# Altium PCB PCB1.PcbDoc
Units mm, origin at the board's own origin, x right, y up, seen from the top; angles counter-clockwise.
Board outline 42 x 60 mm, 2 copper layers (Top Layer, Bottom Layer), stack 1.57 mm thick; 35 components, 51 nets, 178 pads, 7 vias.
Unrouted connection lines stored in the file: 61.
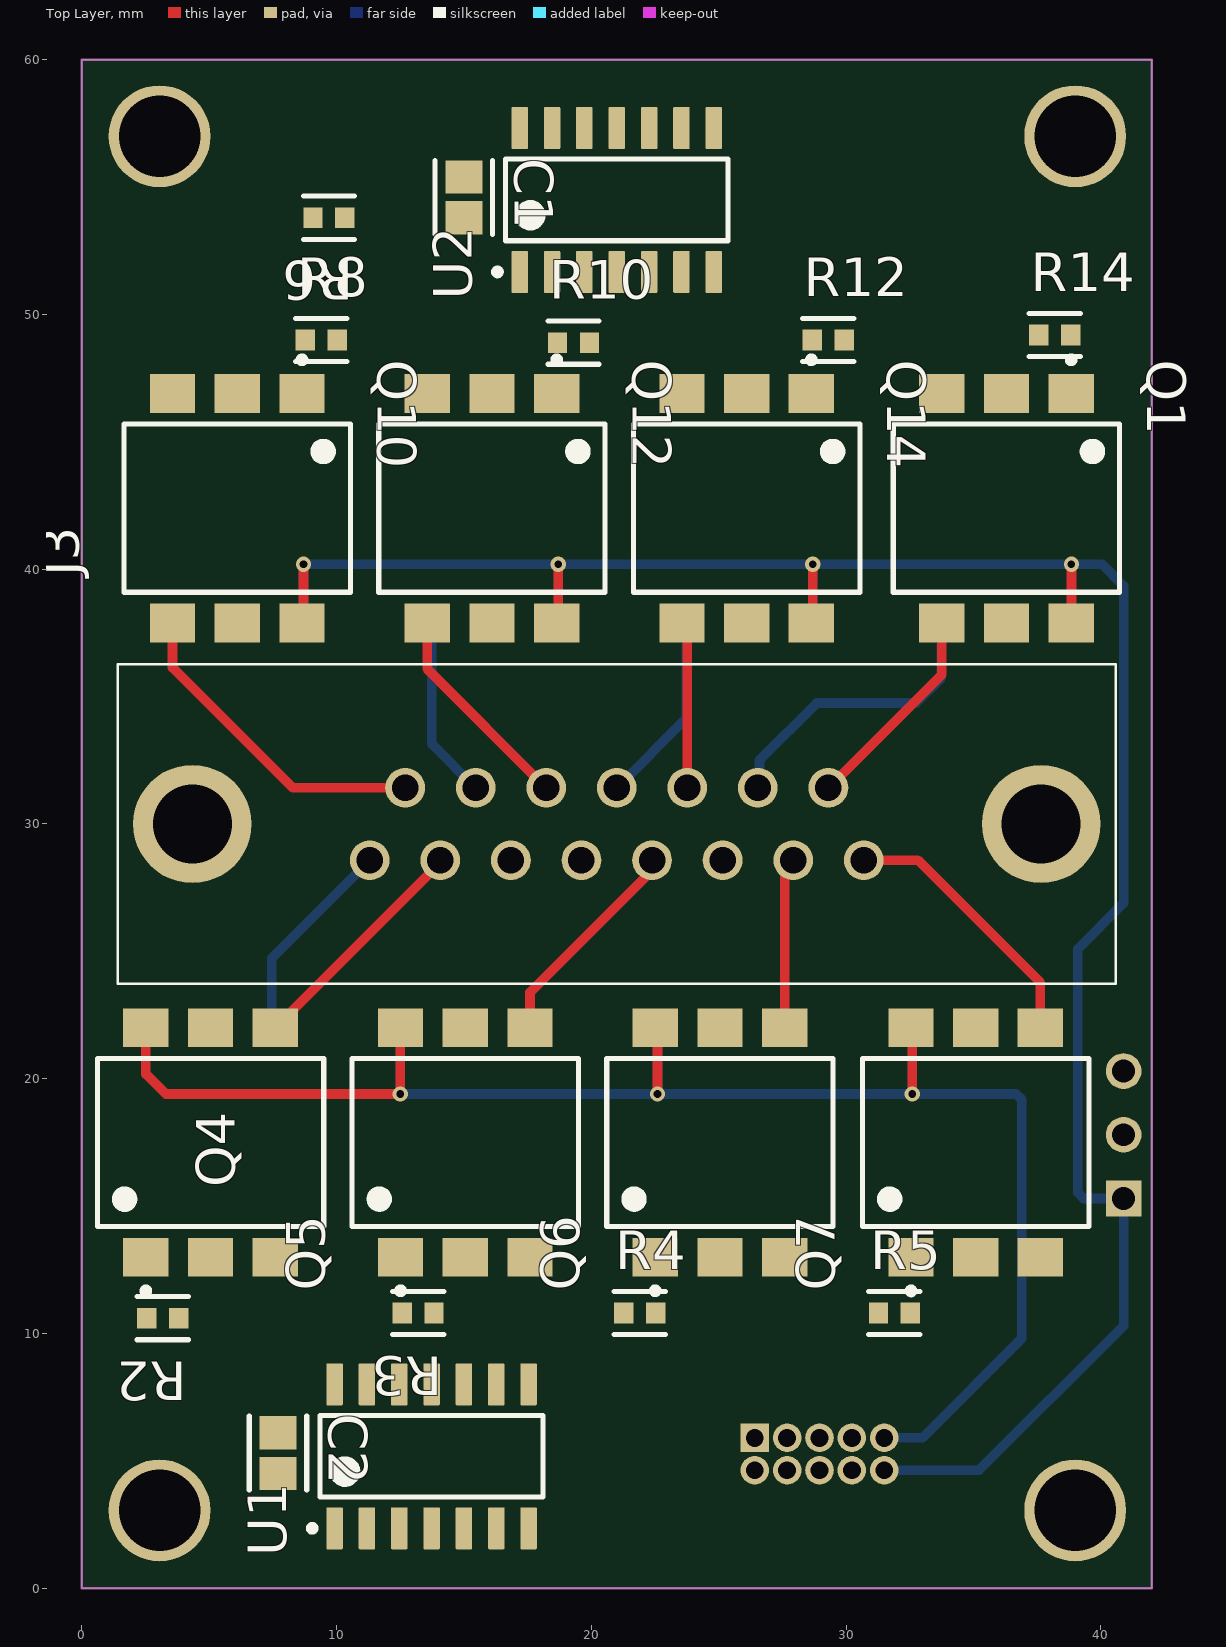
[diagram p0: Top Layer view]
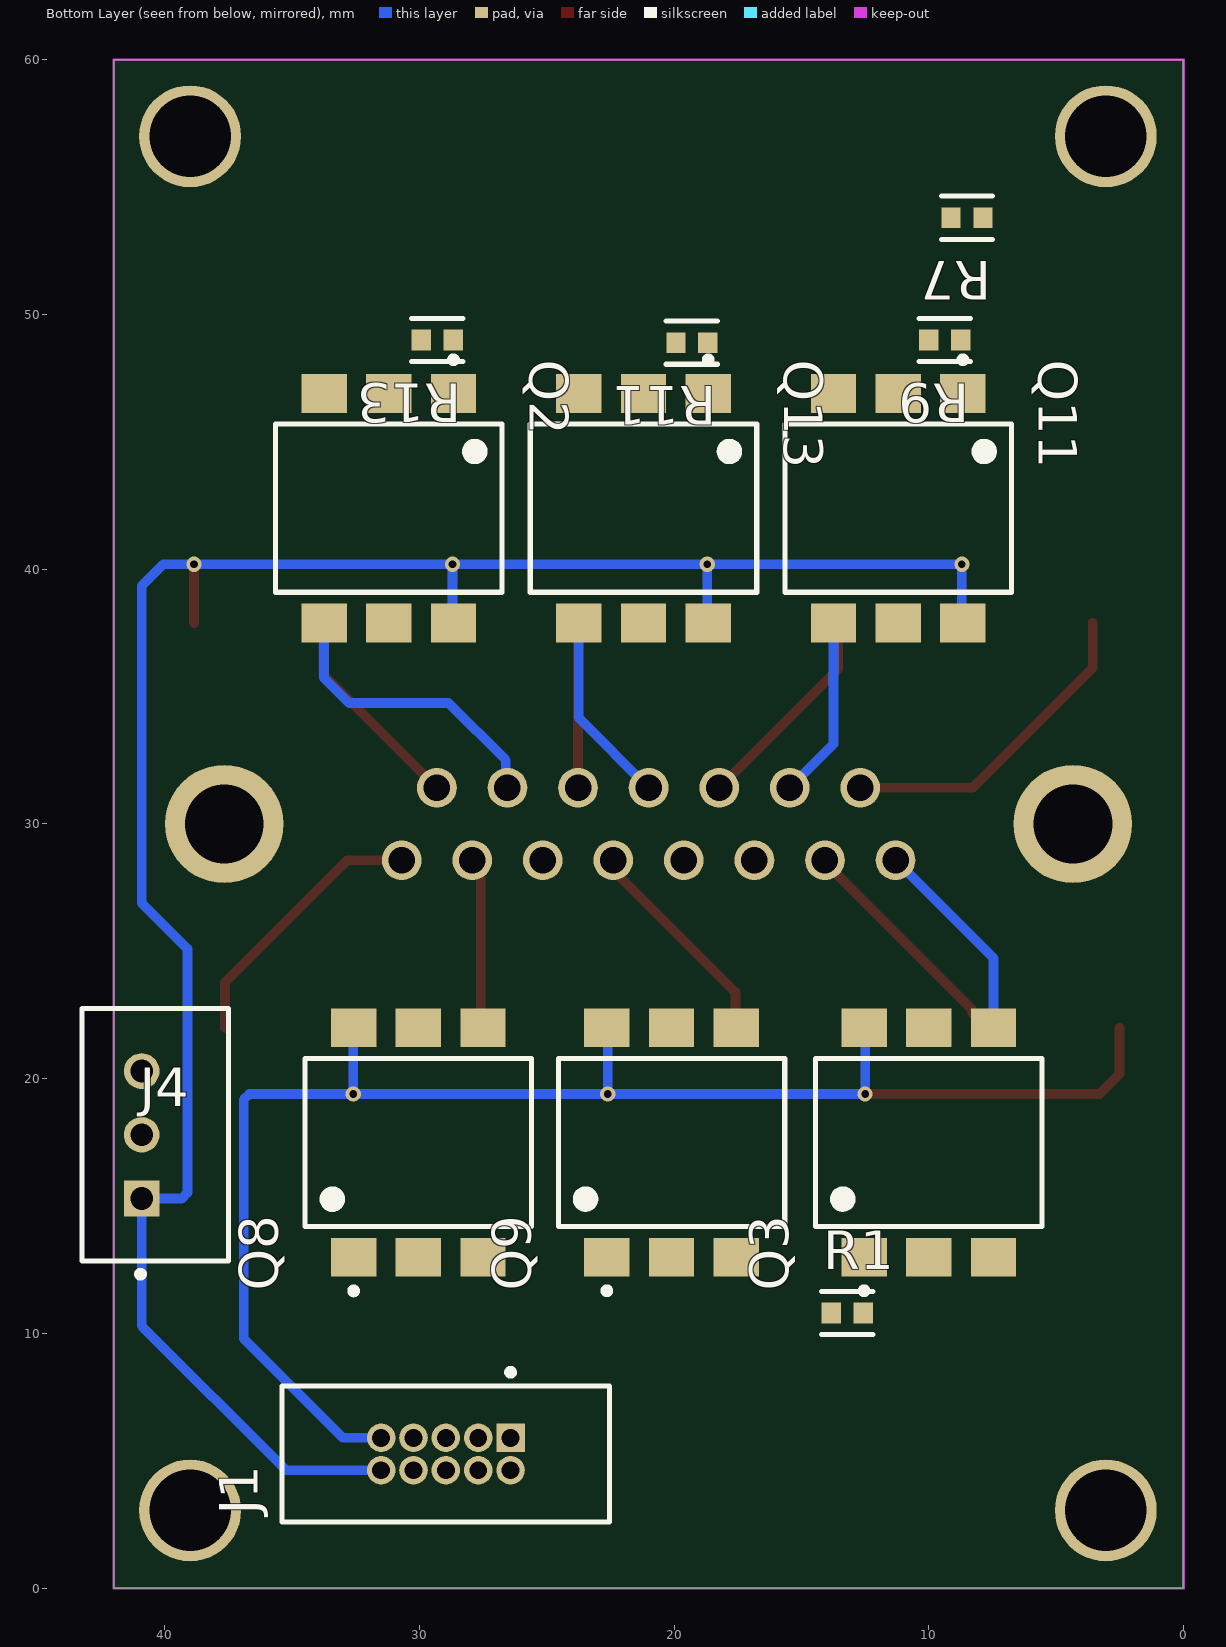
[diagram p1: Bottom Layer view, seen from below]

## Layer stack, top to bottom
Top Solder: solder mask 0.0102, Solder Resist, Dk 3.5
Top Layer: signal copper 0.0356
Dielectric 1: core 1.4986, Core-043, Dk 4.3
Bottom Layer: signal copper 0.0356
Bottom Solder: solder mask 0.0102, Solder Resist, Dk 3.5

## Board outline
0,0 0,60 42,60 42,0

## Design rules (kind name [scope] priority, off if disabled: settings)
AcuteAngle [All] p1: minimum=6.00000000000000E+0001 checktracksonly=TRUE
Clearance Clearance_HV [All vs InNetClass('HV')] p1: gap=0.5 ignorepadtopadclearanceinfootprint=FALSE
Clearance [All] p2: gap=0.254 ignorepadtopadclearanceinfootprint=TRUE except(0: Arc-Text Track-Text Text-Text; 0.089: Arc-Arc Arc-Track Track-Track; 0.127: Arc-SMDPad Arc-THPad Track-SMDPad Track-THPad SMDPad-SMDPad SMDPad-THPad SMDPad-Via SMDPad-Fill THPad-Via; 0.381: SMDPad-Text THPad-Text Via-Text Fill-Text Poly-Text Region-Text; 0.508: THPad-THPad)
DiffPairsRouting [All] p1: maxlimit=0.254 minlimit=0.254 mostfreqgap=0.254 toplayer_minwidth=0.1 toplayer_maxwidth=0.3 toplayer_prefwidth=0.2 bottomlayer_minwidth=0.1 bottomlayer_maxwidth=0.3 bottomlayer_prefwidth=0.2 maxuncoupledlength=12.7
HoleSize [All] p1: absolutevalues=TRUE maxlimit=6.35 minlimit=0.203 maxpercent=80.000 minpercent=20.000
MinimumAnnularRing [All] p1: minimumring=0.13
MinimumSolderMaskSliver [All] p1: minsoldermaskwidth=0.1
PolygonConnect PolygonConnect_6 [All vs IsNamedPolygon('NETDD1_1_L01_P035')] p1: connectstyle=Direct reliefconductorwidth=0.254 reliefentries=4 polygonreliefangle="90 Angle" airgapwidth=0.254
PolygonConnect PolygonConnect_5 [All vs IsNamedPolygon('NETDD1_3_L01_P034')] p2: connectstyle=Direct reliefconductorwidth=0.254 reliefentries=4 polygonreliefangle="90 Angle" airgapwidth=0.254
PolygonConnect PolygonConnect_4 [All vs IsNamedPolygon('NETDD1_3_L01_P034')] p3: connectstyle=Direct reliefconductorwidth=0.254 reliefentries=4 polygonreliefangle="90 Angle" airgapwidth=0.254
PolygonConnect PolygonConnect_3 [All vs IsNamedPolygon('NETDD1_3_L01_P034')] p4: connectstyle=Direct reliefconductorwidth=0.254 reliefentries=4 polygonreliefangle="90 Angle" airgapwidth=0.254
PolygonConnect PolygonConnect_2 [All vs IsNamedPolygon('NETDD1_3_L01_P027')] p5: connectstyle=Direct reliefconductorwidth=0.254 reliefentries=4 polygonreliefangle="90 Angle" airgapwidth=0.254
PolygonConnect PolygonConnect_1 [All vs IsNamedPolygon('NETDD1_3_L01_P027')] p6: connectstyle=Direct reliefconductorwidth=0.254 reliefentries=2 polygonreliefangle="90 Angle" airgapwidth=0.254
PolygonConnect [All] p7: connectstyle=Relief reliefconductorwidth=0.254 reliefentries=4 polygonreliefangle="90 Angle" airgapwidth=0.254
RoutingVias [All] p1: holewidth=0.406 width=0.813 viastyle="Through Hole" minholewidth=0.254 minwidth=0.457 maxholewidth=5.08 maxwidth=7.62
SilkToSolderMaskClearance [IsPad] p1: minsilkscreentomaskgap=0.152 clearancetoexposedcopper=TRUE
SolderMaskExpansion [All] p1: expansion=0.05 istentingtop=FALSE
UnpouredPolygon [All] p1: allowunpoured=TRUE
Width [All] p1: maxlimit=25.4 minlimit=0.102 preferedwidth=0.203
25 further rules are at their usual default settings.

## Classes and differential pairs
net class HV: "HS 1" "HS 2" "HS 3" "HS 4" "HS 5" "HS A" "HS B" "HS C" "HS D" "HS Dot1" "HS Dot2" "HS E" "HS F" "HS G" L N

## Components (designator, comment, footprint, x,y, rotation, side; value= is the part's Value field where it differs from the comment)
C1 "C0805C104M5RACTU" FP-C0805C-DN-IPC_B 15,54.599 r270 top value="0.10 μF"
C2 "C0805C104M5RACTU" FP-C0805C-DN-IPC_B 7.7,5.3 r270 top value="0.10 μF"
J1 "3220-10-0100-00" FP-3220-10-0100-00-MFG 28.96,5.265 r0 bottom
J3 "2301828-1" 23018281 21,30 r180 top locked
J4 "B3B-XH-A(LF)(SN)" FP-B3B-XH-A_LF_SN-MFG 40.375,17.8 r90 bottom
Q1 "MOC3063SR2VM" FP-646BY-MFG 36.3,42.4 r270 top locked
Q2 "MOC3063SR2VM" FP-646BY-MFG 31.2,42.4 r270 bottom locked
Q3 "MOC3063SR2VM" FP-646BY-MFG 10,17.5 r90 bottom locked
Q4 "MOC3063SR2VM" FP-646BY-MFG 5.052,17.495 r90 top locked
Q5 "MOC3063SR2VM" FP-646BY-MFG 15.052,17.5 r90 top locked
Q6 "MOC3063SR2VM" FP-646BY-MFG 25.052,17.5 r90 top locked
Q7 "MOC3063SR2VM" FP-646BY-MFG 35.092,17.495 r90 top locked
Q8 "MOC3063SR2VM" FP-646BY-MFG 30.04,17.495 r90 bottom locked
Q9 "MOC3063SR2VM" FP-646BY-MFG 20.1,17.5 r90 bottom locked
Q10 "MOC3063SR2VM" FP-646BY-MFG 6.1,42.4 r270 top locked
Q11 "MOC3063SR2VM" FP-646BY-MFG 11.2,42.4 r270 bottom locked
Q12 "MOC3063SR2VM" FP-646BY-MFG 16.1,42.4 r270 top locked
Q13 "MOC3063SR2VM" FP-646BY-MFG 21.2,42.4 r270 bottom locked
Q14 "MOC3063SR2VM" FP-646BY-MFG 26.1,42.4 r270 top locked
R1 "CRGCQ0603F270R" FP-CRGCQ0603-IPC_C 13.2,10.8 r180 bottom value=270Ω
R2 "CRGCQ0603F270R" FP-CRGCQ0603-IPC_C 3.173,10.6 r180 top value=270Ω
R3 "CRGCQ0603F270R" FP-CRGCQ0603-IPC_C 13.2,10.8 r180 top value=270Ω
R4 "CRGCQ0603F270R" FP-CRGCQ0603-IPC_C 21.9,10.8 r0 top value=270Ω
R5 "CRGCQ0603F270R" FP-CRGCQ0603-IPC_C 31.9,10.8 r0 top value=270Ω
R6 "CRGCQ0603F270R" FP-CRGCQ0603-IPC_C 9.7,53.8 r180 top value=270Ω
R7 "CRGCQ0603F270R" FP-CRGCQ0603-IPC_C 8.5,53.8 r0 bottom value=270Ω
R8 "CRGCQ0603F270R" FP-CRGCQ0603-IPC_C 9.4,49 r0 top value=270Ω
R9 "CRGCQ0603F270R" FP-CRGCQ0603-IPC_C 9.373,49 r0 bottom value=270Ω
R10 "CRGCQ0603F270R" FP-CRGCQ0603-IPC_C 19.3,48.9 r0 top value=270Ω
R11 "CRGCQ0603F270R" FP-CRGCQ0603-IPC_C 19.3,48.9 r0 bottom value=270Ω
R12 "CRGCQ0603F270R" FP-CRGCQ0603-IPC_C 29.3,49 r0 top value=270Ω
R13 "CRGCQ0603F270R" FP-CRGCQ0603-IPC_C 29.3,49 r0 bottom value=270Ω
R14 "CRGCQ0603F270R" FP-CRGCQ0603-IPC_C 38.2,49.2 r0 top value=270Ω
U1 "SN74HC164DR" D0014A_M 13.73,5.175 r90 top
U2 "SN74HC164DR" D0014A_M 21,54.5 r90 top

## Footprints (in the part's own frame and the unit in brackets; to place one, negate y for a bottom-side part, rotate by r counter-clockwise, add the part's x,y. Pads: shape width x height; smd on the part's side, far side on the other; paste and mask are expansions set on the pad)
23018281 [mm]
  round 1.56 hole 1.04: 1(-9.695,1.42) 2(-6.925,1.42) 3(-4.155,1.42) 4(-1.385,1.42) 5(1.385,1.42) 6(4.155,1.42) 7(6.925,1.42) 8(9.695,1.42) 9(-8.31,-1.42) 10(-5.54,-1.42) 11(-2.77,-1.42) 12(0,-1.42) 13(2.77,-1.42) 14(5.54,-1.42) 15(8.31,-1.42)
  round 4.65 hole 3.1: MH1(-16.66,0) MH2(16.66,0)
  silkscreen extent -19.59,-6.28 19.59,6.27, body extent -19.58,-6.25 19.6,6.29, height 13
D0014A_M [mm] "SOIC, 14-Leads, Body 8.75x4mm, Pitch 1.27mm, IPC Low Density"
  rrect15% 1.65x0.65 smd: 1(-2.825,3.81) 2(-2.825,2.54) 3(-2.825,1.27) 4(-2.825,0) 5(-2.825,-1.27) 6(-2.825,-2.54) 7(-2.825,-3.81) 8(2.825,-3.81) 9(2.825,-2.54) 10(2.825,-1.27) 11(2.825,0) 12(2.825,1.27) 13(2.825,2.54) 14(2.825,3.81)
  silkscreen extent -2.95,-4.38 1.6,4.81, body extent -3.02,-4.32 3.02,4.32, height 1.59
FP-646BY-MFG [mm]
  rect 1.52x1.78 smd paste+0 mask+0: 1(-4.505,2.54) 2(-4.505,0) 3(-4.505,-2.54) 4(4.505,-2.54) 5(4.505,0) 6(4.505,2.54)
  silkscreen extent -5.95,-4.45 3.3,4.45, body extent -4.58,-4.26 4.58,4.26, height 4.95
FP-3220-10-0100-00-MFG [mm]
  rect 1.12x1.12 hole 0.7 paste-2539.97 mask+0: 1(-2.54,-0.635)
  round 1.12 hole 0.7 paste-2539.97 mask+0: 2(-2.54,0.635) 3(-1.27,-0.635) 4(-1.27,0.635) 5(0,-0.635) 6(0,0.635) 7(1.27,-0.635) 8(1.27,0.635) 9(2.54,-0.635) 10(2.54,0.635)
  silkscreen extent -6.43,-3.33 6.43,2.68, body extent -6.32,-2.58 6.32,2.55, height 5.4
FP-B3B-XH-A_LF_SN-MFG [mm]
  rect 1.4x1.4 hole 0.9 paste-2539.97 mask+0: 1(-2.5,0.525)
  round 1.4 hole 0.9 paste-2539.97 mask+0: 2(0,0.525) 3(2.5,0.525)
  silkscreen extent -5.6,-2.88 4.95,2.88, body extent -4.95,-2.88 4.95,2.89, height 7
FP-C0805C-DN-IPC_B [mm]
  rect 1.305x1.456 smd paste+0 mask+0: 1(-0.801,0) 2(0.801,0)
  silkscreen extent -1.45,-1.13 1.45,1.13, body extent -1.7,-0.98 1.7,0.98, height 0.25
FP-CRGCQ0603-IPC_C [mm]
  rect 0.758x0.812 smd paste+0 mask+0: 1(-0.627,0) 2(0.627,0)
  silkscreen extent -1.01,-0.85 1.01,0.85, body extent -0.8,-0.4 0.8,0.4, height 0.55

## Part data
C1 C2: library part CMP-1036-04423-3, "CAP CER 0.1UF 50V X7R 0805", Capacitance="0.10 μF", Manufacturer=KEMET, Package=C0805C-DN, Temperature="-55°C to +125°C", Temperature Characteristic=X7R, Temperature Coefficient=30ppm/°C, Temperature Range High=+125°C, Temperature Range Low=-55°C, Tolerance=0.2, Voltage Rating="50 V", Automotive=No, Category=Cap, ComponentLink2Description=Datasheet, ComponentLink2URL=https://content.kemet.com/datasheets/KEM_C1003_C0G_SMD.pdf, Device Class L1="Passive Components", Device Class L2=Capacitors, Device Class L3="Ceramic Capacitors", Digikey Description="CAP CER 0.1UF 50V X7R 0805", Height=0.88mm, Ipc Land Pattern Name=CAPC200125X78, Lead Free=Yes, Manufacturer Part Number=C0805C104M5RACTU, Material=Ceramic, Mouser Description="Multilayer Ceramic Capacitors MLCC - SMD/SMT 50volts 0.1uF X7R 20%", Octopart=https://octopart.com/c0805c104m5ractu-kemet-129379, RoHS=TRUE
J1: library part CMP-04151-26714221-1, "3220-10-0100-00 Conn Shrouded Header (4 Sides) HDR 10 POS 1.27mm Solder ST Top Entry Thru-Hole", Current Rating=1A, Max Operating Temperature=105°C, Min Operating Temperature=-40°C, Connector Type="Male Pin", Contact Material=Gold, Contact Plating=Gold, Height=5.6mm, Mount="Through Hole", NexarPartId=26714221, Number of Contacts=10, Number of Positions=10, Number of Rows=2, Pitch=1.27mm, RoHS=Compliant, Row Spacing=1.27mm, Termination=Solder
J3: "Body Features: Connector Profile High", Manufacturer_Name="TE Connectivity", Mouser Part Number=571-2301828-1, Arrow Part Number=2301828-1, Arrow Price/Stock=https://www.arrow.com/en/products/2301828-1/te-connectivity, Datasheet Link=https://www.arrow.com/en/products/2301828-1/te-connectivity, Geometry.Height=12.48mm, Manufacturer_Part_Number=2301828-1, Mouser Price/Stock=https://www.mouser.co.uk/ProductDetail/TE-Connectivity/2301828-1?qs=byeeYqUIh0OzT0Qo7TiYRg%3D%3D
J4: library part CMP-17439-000014-3, "CONN HEADER VERT 3POS 2.5MM", Color=Natural, Contact Resistance=20mR, Current Rating=3A, Flammability Rating="UL94 V-0", Housing Color=White, Insulation Resistance=1GR, Max Operating Temperature=85°C, Max Voltage Rating (AC)=250V, Min Operating Temperature=-25°C, Connector Type=Header, Contact Finish - Mating=TIN, Contact Material=Brass, Contact Plating=Tin, Contact Shape=Square, Contact Type="Male Pin", Depth=5.75mm, Fastening Type=Detent, Gender=Male, Housing Material=Polyamide, Insulation Color=Natural, Insulation Material=Nylon, Lead Free="Lead Free", Lead Pitch=2.5mm, Length=9.9mm, Max Current Rating=3A, Max Voltage Rating (DC)=250V, Mount="Through Hole", Number of Contacts=3, Number of Positions=3, Number of Rows=1, Orientation=Straight, Packaging=Bulk, Pitch=2.5mm, REACH SVHC="No SVHC", Series=XH, Termination=Solder, Voltage Rating=250V, Voltage Rating (AC)=250V, Wire/Cable Gauge=22AWG
Q1 Q2 Q3 Q4 Q5 Q6 Q7 Q8 Q9 Q10 Q11 Q12 Q13 Q14: library part CMP-07144-000012-1, "OPTOISOLATOR 4.17KV TRIAC 6SMD", Forward Current=30mA, Forward Voltage=1.3V, Isolation Voltage=4170Vrms, Manufacturer="ON Semiconductor", Max Junction Temp=+100°C, Package=646BY, Power Dissipation=250mW, Reverse Voltage=6V, Temperature="-40°C to +85°C", Temperature Range High=+85°C, Temperature Range Low=-40°C, Automotive=No, Category=Trans, ComponentLink2Description=Datasheet, ComponentLink2URL=https://www.onsemi.com/pub/Collateral/MOC3163M-D.pdf, Device Class L1=Optoelectronics, Device Class L2=Optocouplers, Device Class L3=unset, Digikey Description="OPTOISOLATOR 4.17KV TRIAC 6SMD", Footprint Url=https://www.onsemi.com/pub/Collateral/646BY.PDF, Height=4.8mm, Lead Free=Yes, Manufacturer Part Number=MOC3063SR2VM, Mouser Description="Triac Driver Output Optocoupler, 6-Pin DIP 600V Zero Crossing", Octopart=https://octopart.com/moc3063sr2vm-on+semiconductor-84330447, RoHS=TRUE, Standoff Height=0.38mm
R1 R2 R3 R4 R5 R6 R7 R8 R9 R10 R11 R12 R13 R14: library part CMP-03211-000598-1, "CRGCQ0603 270Ω 1% ±100ppm/°C 75V", Ambient Temperature Range High=+70°C, Manufacturer="TE Connectivity", Package=CRGCQ0603, Power Rating=0.1W, Resistance=270Ω, Temperature="-55°C to +155°C", Temperature Coefficient=±100ppm/°C, Temperature Range High=+155°C, Temperature Range Low=-55°C, Tolerance=0.01, Voltage Rating=75V, Category=Res, ComponentLink2Description=Datasheet, ComponentLink2URL=https://www.te.com/commerce/DocumentDelivery/DDEController?Action=showdoc&DocId=Data+Sheet%7F1773204-3%7F1%7Fpdf%7FEnglish%7FENG_DS_1773204-3_1.pdf%7F4-2176339-560, Composition="Thick Film", Device Class L1="Passive Components", Device Class L2=Resistors, Device Class L3="Chip SMD Resistors", Height=0.55mm, Ipc Land Pattern Name=RESC16080X45, Lead Free=Yes, Manufacturer Part Number=CRGCQ0603F270R, Octopart=https://octopart.com/crgcq0603f270r-te+connectivity-91018060, RoHS=TRUE, Series=CRGCQ
U1 U2: library part CMP-0780-00006-3, "8-Bit Parallel-Out Serial Shift Registers, D0014A, LARGE T&R", F @ Nom Voltage(Max)(Mhz)=28, Generic Part Number=SN74HC164, ICC @ Nom Voltage(Max)(mA)=0.08, Manufacturer="Texas Instruments", Operating Temperature Range(C)="-40 to 125", Rating=Catalog, tpd @ Nom Voltage(Max)(ns)=38, Voltage(Nom)(V)=6, 3-State Output=No, Bits=8, Code_JEDEC=MS-012, DatasheetVersion=SCLS115F, Input Type=CMOS, Output Drive (IOL/IOH)(Max)(mA)=5.2/-5.2, Output Type=CMOS, PackageReference=D0014A, PackageVersion=http://www.ti.com/lit/ml/mpds177g/mpds177g.pdf, Technology Family=HC, VCC(Max)(V)=6, VCC(Min)(V)=2

## Free pads (board coordinates)
  round 4 hole 3.2 unplated: 3(3.05,3.05) 3(3.05,57) 3(39,3.05) 3(39,57)

## Via types
v1: diameter 0.6, hole 0.3, Top Layer to Bottom Layer, tented both sides, 7 vias

## Nets (pads, with @x,y where several pads share a name; then routed paths per layer and width w, separated by ;. In a path a pad name is that pad's centre, name@x,y a point inside that pad or via, vN(x,y) a via of type N, cw(c..) or ccw(c..) an arc to the next point about the centre after c; other vN are vias at no path point)
+3.3: C1.1 C2.1 J1.2 U1.14 U2.14
Clr: J1.3 U1.8 U2.8
Data_in: J1.6 U1.1 U1.2
Data_out: J1.5 U2.13
GND: C1.2 C2.2 J1.1 Q1.2 Q2.2 Q3.2 Q4.2 Q5.2 Q6.2 Q7.2 Q8.2 Q9.2 Q10.2 Q11.2 Q12.2 Q13.2 Q14.2 U1.7 U2.7
"HS 1": J3.8 Q3.4 | length 8.2
  Bottom Layer w0.381: Q3.4 7.46,24.735 J3.8
"HS 2": J3.7 Q4.4 | length 9.3
  Top Layer w0.381: Q4.4 7.722,22 8.291,22.569 8.291,22.699 14.075,28.483 J3.7
"HS 3": J3.4 Q5.4 | length 8.6
  Top Layer w0.381: Q5.4 17.592,23.392 22.159,27.959 22.159,28.354 J3.4
"HS 4": J3.2 Q6.4 | length 6.7
  Top Layer w0.381: Q6.4 27.592,27.928 27.925,28.261 J3.2
"HS 5": J3.1 Q7.4 | length 10.7
  Top Layer w0.381: J3.1 32.82,28.58 37.632,23.768 Q7.4
"HS A": J3.15 Q10.4 | length 12.8
  Top Layer w0.381: Q10.4 3.56,36.14 8.28,31.42 J3.15
"HS B": J3.14 Q11.4 | length 7.2
  Bottom Layer w0.381: Q11.4 13.74,33.14 J3.14
"HS C": J3.13 Q12.4 | length 8.4
  Top Layer w0.381: Q12.4 13.56,36.09 J3.13
"HS D": J3.12 Q13.4 | length 7.6
  Bottom Layer w0.381: J3.12 23.74,34.16 Q13.4
"HS Dot1": J4.2 Q8.4
"HS Dot2": J4.3 Q9.4
"HS E": J3.11 Q14.4 | length 6.6
  Top Layer w0.381: Q14.4 23.77,37.685 J3.11
"HS F": J3.10 Q2.4 | length 11.7
  Bottom Layer w0.381: J3.10 26.605,31.485 26.605,32.505 28.854,34.754 32.754,34.754 33.74,35.74 Q2.4
"HS G": J3.9 Q1.4 | length 8.3
  Top Layer w0.381: J3.9 33.76,35.87 Q1.4
L: J1.9 Q3.6 Q4.6 Q5.6 Q6.6 Q7.6 Q8.6 Q9.6 | length 68.7
  Top Layer w0.381: Q4.6 2.512,20.188 3.3,19.4 v1(12.5,19.4) 12.5,21.993 Q5.6 ; Q6.6 22.6,21.917 v1(22.6,19.4) ; Q7.6 32.6,21.952 v1(32.6,19.4)
  Bottom Layer w0.381: Q3.6 12.5,21.965 v1(12.5,19.4) v1(22.6,19.4) ; Q9.6 22.6,21.965 v1(22.6,19.4) ; J1.9 33,5.9 36.9,9.8 36.9,19.177 36.677,19.4 v1(32.6,19.4) ; Q8.6 32.6,21.98 v1(32.6,19.4) ; v1(22.6,19.4) v1(32.6,19.4)
"LS 1": R1.1 U1.3
"LS 2": R2.1 U1.4
"LS 3": R3.1 U1.5
"LS 4": R4.1 U1.6
"LS 5": R5.1 U1.10
"LS A": R8.2 U2.3
"LS B": R9.2 U2.4
"LS C": R10.2 U2.5
"LS D": R11.2 U2.6
"LS Dot1": R6.1 U1.11
"LS Dot2": R7.1 U1.12
"LS E": R12.2 U2.10
"LS F": R13.2 U2.11
"LS G": R14.1 U2.12
N: J1.10 J4.1 Q1.6 Q2.6 Q10.6 Q11.6 Q12.6 Q13.6 Q14.6 | length 92
  Top Layer w0.381: Q10.6 8.7,37.955 v1(8.7,40.2) ; Q12.6 18.7,37.955 v1(18.7,40.2) ; Q14.6 28.7,37.955 v1(28.7,40.2) ; Q1.6 38.85,37.905 v1(38.85,40.2)
  Bottom Layer w0.381: Q11.6 8.7,37.935 v1(8.7,40.2) v1(18.7,40.2) ; Q13.6 18.7,37.935 v1(18.7,40.2) ; Q2.6 28.7,37.935 v1(28.7,40.2) ; J1.10 35.23,4.63 40.9,10.3 J4.1 39.323,15.3 39.1,15.523 39.1,25.1 40.9,26.9 40.9,39.35 40.05,40.2 v1(38.85,40.2) v1(28.7,40.2) ; v1(18.7,40.2) v1(28.7,40.2)
NetQ1_1: Q1.1 R14.2
NetQ2_1: Q2.1 R13.1
NetQ3_1: Q3.1 R1.2
NetQ4_1: Q4.1 R2.2
NetQ5_1: Q5.1 R3.2
NetQ6_1: Q6.1 R4.2
NetQ7_1: Q7.1 R5.2
NetQ8_1: Q8.1 R6.2
NetQ9_1: Q9.1 R7.2
NetQ10_1: Q10.1 R8.1
NetQ11_1: Q11.1 R9.1
NetQ12_1: Q12.1 R10.1
NetQ13_1: Q13.1 R11.1
NetQ14_1: Q14.1 R12.1
NetU1_13: U1.13 U2.1 U2.2
Reset: J1.4 U1.9 U2.9
pads on no net: J1.7 J1.8 J3.3 J3.5 J3.6 J3.MH1 J3.MH2 Q1.3 Q1.5 Q2.3 Q2.5 Q3.3 Q3.5 Q4.3 Q4.5 Q5.3 Q5.5 Q6.3 Q6.5 Q7.3 Q7.5 Q8.3 Q8.5 Q9.3 Q9.5 Q10.3 Q10.5 Q11.3 Q11.5 Q12.3 Q12.5 Q13.3 Q13.5 Q14.3 Q14.5

## Keep-outs
Keep-Out Layer:
  the board outline again, w0.1